# EAGLE board Schematic1_autorouted (EAGLE 9.3.0)
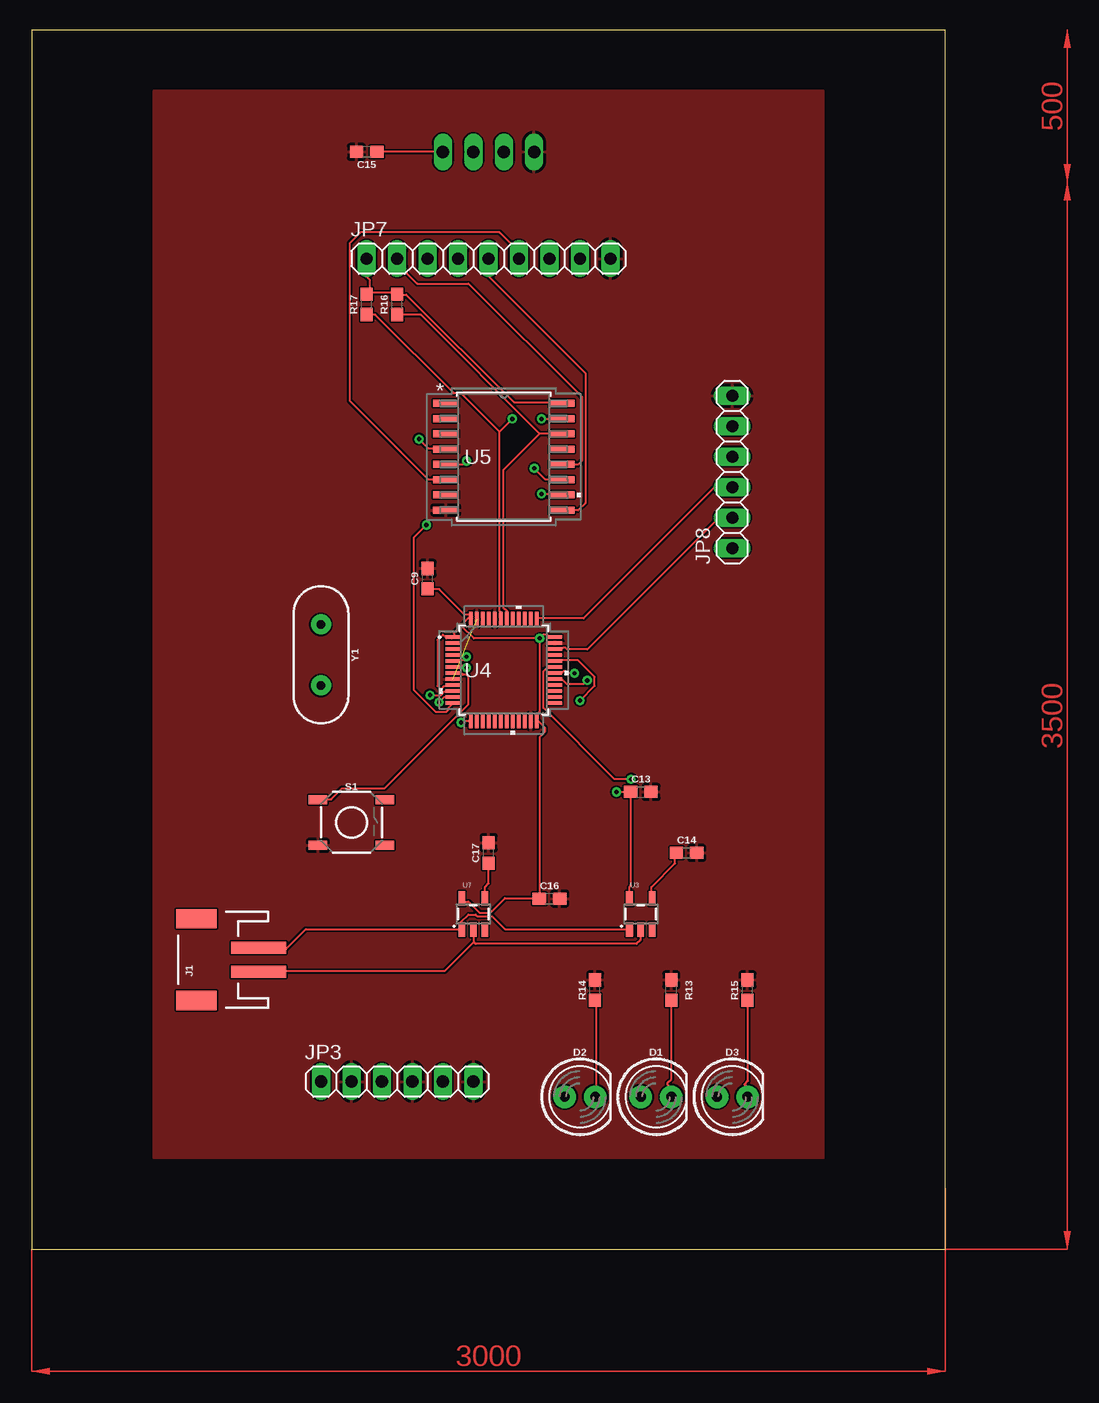
[diagram p0: board, top side]
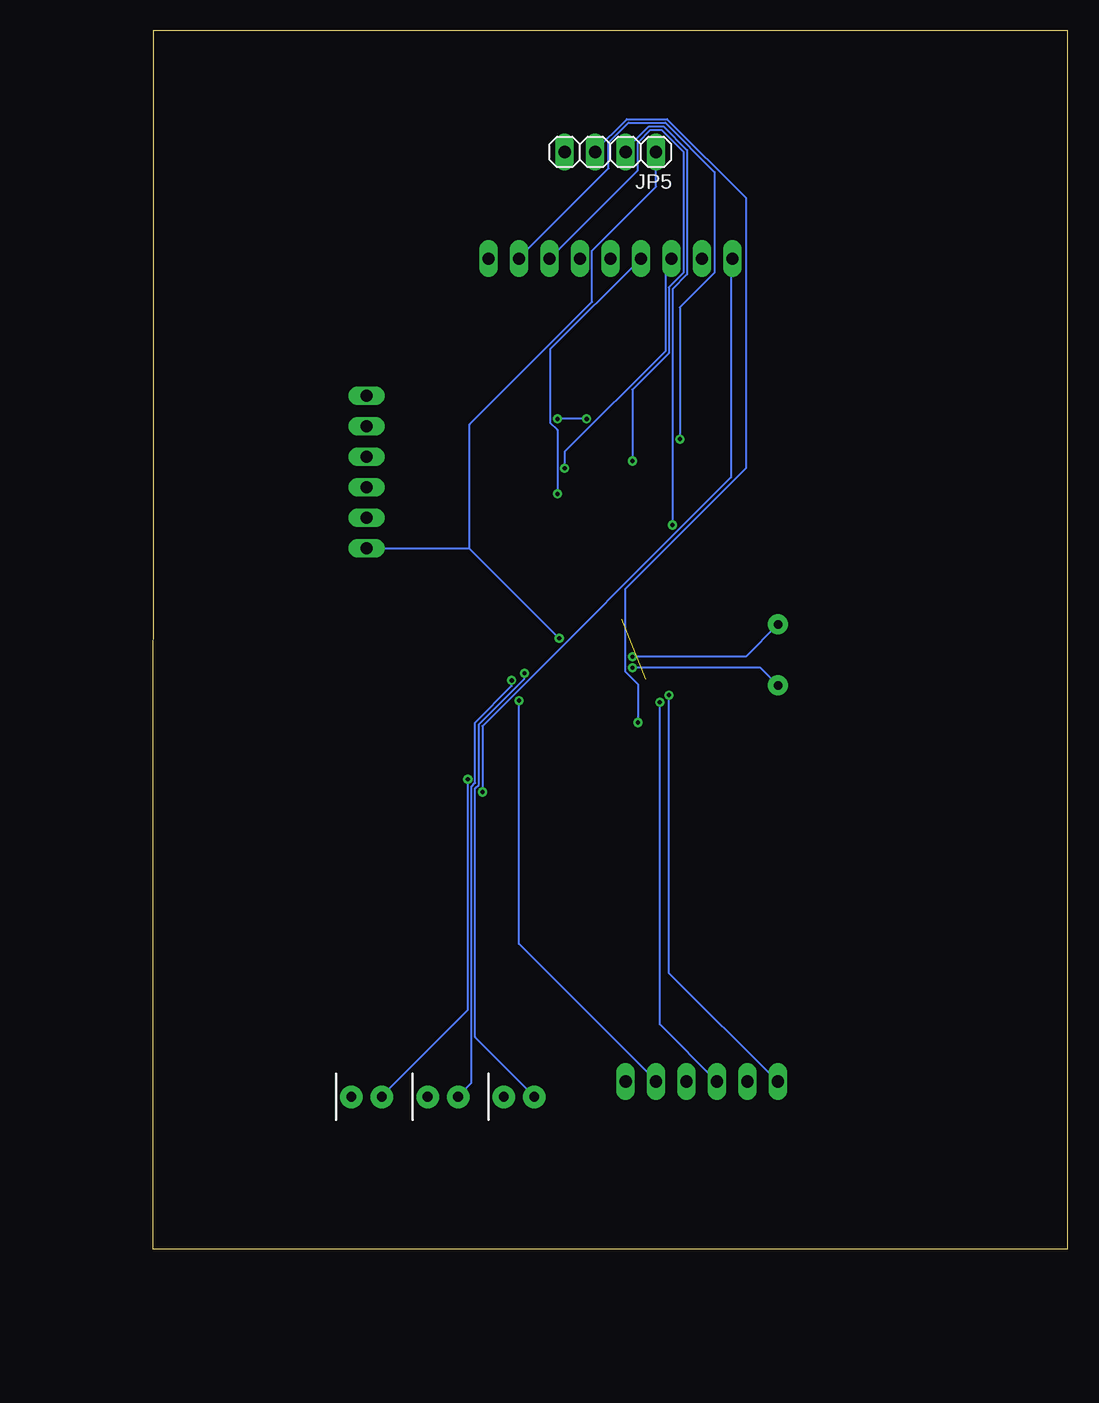
[diagram p1: board, bottom side, seen from below]

Size 76.2 x 101.6 mm. Coordinates in mm from the lower left corner, seen from the top.
Outline: 0,0 76.2,0 76.18,101.6 0,101.6 0,0
Copper layers (1*16): Top 0.035mm / dielectric 1.5mm / Bottom 0.035mm
Design rules "default": minimum track width 6mil, minimum drill 0.35mm, track to track 6mil, track to pad 6mil, pad to pad 6mil, via to via 6mil, smd to smd 6mil, copper to edge 40mil, drill to drill 6mil, minimum pad ring 10mil, minimum via ring 8mil, stop-mask expansion 4mil, vias tented up to drill 0mil, thermal gap 10mil

## Footprints (pad centres in the part's own frame; a part is rotated, then mirrored left to right if it is on the bottom)
0603 = smd 1.1 x 1: 1 -0.85,0; 2 0.85,0
LED_5MM = drill 0.813 pad 1.88: A -1.27,0; K 1.27,0
JST-2-SMD = smd 1 x 4.6: 1 -1,-3.7; 2 1,-3.7 | smd 1.6 x 3.4: NC1 -3.4,1.5; NC2 3.4,1.5
1X06 = drill 1.016 long: 1 -6.35,0; 2 -3.81,0; 3 -1.27,0; 4 1.27,0; 5 3.81,0; 6 6.35,0
1X04 = drill 1.016 long: 1 -3.81,0; 2 -1.27,0; 3 1.27,0; 4 3.81,0
1X09 = drill 1.016 long: 1 -10.16,0; 2 -7.62,0; 3 -5.08,0; 4 -2.54,0; 5 0,0; 6 2.54,0; 7 5.08,0; 8 7.62,0; 9 10.16,0
TACTILE_SWITCH_SMD_5.2MM = smd 1.524 x 0.762: 1 -2.794,1.905; 2 2.794,1.905; 3 -2.794,-1.905; 4 2.794,-1.905
SOT23-5 = smd 0.55 x 1.2: 1 -0.95,-1.3; 2 0,-1.3; 3 0.95,-1.3; 4 0.95,1.3; 5 -0.95,1.3
LQFP48-7X7MM = smd 1.194 x 0.305: 1 -4.25,2.75; 2 -4.25,2.25; 3 -4.25,1.75; 4 -4.25,1.25; 5 -4.25,0.75; 6 -4.25,0.25; 7 -4.25,-0.25; 8 -4.25,-0.75; 9 -4.25,-1.25; 10 -4.25,-1.75; 11 -4.25,-2.25; 12 -4.25,-2.75; 25 4.25,-2.75; 26 4.25,-2.25; 27 4.25,-1.75; 28 4.25,-1.25; 29 4.25,-0.75; 30 4.25,-0.25; 31 4.25,0.25; 32 4.25,0.75; 33 4.25,1.25; 34 4.25,1.75; 35 4.25,2.25; 36 4.25,2.75 | smd 0.305 x 1.194: 13 -2.75,-4.25; 14 -2.25,-4.25; 15 -1.75,-4.25; 16 -1.25,-4.25; 17 -0.75,-4.25; 18 -0.25,-4.25; 19 0.25,-4.25; 20 0.75,-4.25; 21 1.25,-4.25; 22 1.75,-4.25; 23 2.25,-4.25; 24 2.75,-4.25; 37 2.75,4.25; 38 2.25,4.25; 39 1.75,4.25; 40 1.25,4.25; 41 0.75,4.25; 42 0.25,4.25; 43 -0.25,4.25; 44 -0.75,4.25; 45 -1.25,4.25; 46 -1.75,4.25; 47 -2.25,4.25; 48 -2.75,4.25
SOT162-1-M = smd 2.108 x 0.584: 1 -4.826,4.445; 2 -4.826,3.175; 3 -4.826,1.905; 4 -4.826,0.635; 5 -4.826,-0.635; 6 -4.826,-1.905; 7 -4.826,-3.175; 8 -4.826,-4.445; 9 4.826,-4.445; 10 4.826,-3.175; 11 4.826,-1.905; 12 4.826,-0.635; 13 4.826,0.635; 14 4.826,1.905; 15 4.826,3.175; 16 4.826,4.445
HC49US = drill 0.7 pad 1.651: 1 -2.54,0; 2 2.54,0

## Placement (x,y rotation side)
C9  10uF  [0603]  33.02,55.88 90 top
C13  2.2uF  [0603]  50.8,38.1 0 top
C14  470pF  [0603]  54.61,33.02 0 top
C15  2.2uF  [0603]  27.94,91.44 180 top
C16  2.2uF  [0603]  43.18,29.21 0 top
C17  470pF  [0603]  38.1,33.02 90 top
D1  [LED_5MM]  52.07,12.7 0 top
D2  [LED_5MM]  45.72,12.7 0 top
D3  [LED_5MM]  58.42,12.7 0 top
J1  [JST-2-SMD]  15.24,24.13 90 top
JP3  [1X06]  30.48,13.97 0 top
JP5  [1X04]  38.1,91.44 180 bottom
JP7  [1X09]  38.1,82.55 0 top
JP8  [1X06]  58.42,64.77 90 top
R13  [0603]  53.34,21.59 90 top
R14  [0603]  46.99,21.59 90 top
R15  [0603]  59.69,21.59 90 top
R16  [0603]  30.48,78.74 90 top
R17  [0603]  27.94,78.74 90 top
S1  MOMENTARY-SWITCH-SPST-SMD-5.2MM  [TACTILE_SWITCH_SMD_5.2MM]  26.67,35.56 0 top
U3  5V  [SOT23-5]  50.8,27.94 0 top
U4  STM32F0XXC1T  [LQFP48-7X7MM]  39.37,48.26 0 top
U5  PCF8574T/3,512SOT162-1-M  [SOT162-1-M]  39.37,66.04 0 top
U7  3.3V/150mA  [SOT23-5]  36.83,27.94 0 top
Y1  [HC49US]  24.13,49.53 270 top

## Library data of the parts
C9 = SparkFun-Capacitors; PROD_ID: CAP-11015
C13 C15 C16 = SparkFun-Capacitors; PROD_ID: CAP-07888
C14 C17 = SparkFun-Capacitors; PROD_ID: CAP-07884
D1-D3 = SparkFun-LED
J1 = SparkFun-Connectors; PROD_ID: CONN-11443; SF_ID: PRT-08612
JP3 JP5 JP7 JP8 = pinhead
R13-R17 = SparkFun-Resistors
S1 = SparkFun-Switches; PROD_ID: SWCH-08247; SF_SKU: COM-08720
U3 = SparkFun-IC-Power; PROD_ID: VREG-00823
U4 = ECE477_Resources; MANUFACTURER_PART_NUMBER: stm32f0xxc1t; VENDOR: STMicroelectronics
U5 = ECE477_Resources; MANUFACTURER_PART_NUMBER: PCF8574T3512; VENDOR: NXP
U7 = SparkFun-IC-Power; PROD_ID: VREG-00822
Y1 = SparkFun-Clocks

## Nets
A0: JP3.1 U4.10
A1: JP3.3 U4.11
A2: JP5.2 U4.12
A3: JP5.3 U4.13
A4: U4.14
A5: U4.15
A6: U4.16
A7: U4.17
A8: D1.A U4.29
A9: D2.A U4.30
A10: D3.A U4.31
A11: JP3.5 U4.32
A13: JP8.2 U4.34
A14: JP8.3 U4.37
B6: R16.1 U4.42 U5.14
B7: R17.1 U4.43 U5.15
D0: JP7.8 U5.4
D1: JP7.7 U5.5
D2: JP7.6 U5.6
D4: JP7.5 U5.9
D5: JP7.4 U5.10
D6: JP7.3 U5.11
D7: JP7.2 U5.12
GND: C9.2 C13.2 C14.2 C15.2 C16.2 C17.2 JP3.2 JP3.4 JP3.6 JP5.4 JP7.9 JP8.6 R13.2 R14.2 R15.2 S1.3 U4.8 U4.23 U4.35 U4.44 U4.47 U5.8
N$10: S1.1 U4.7
N$21: U4.5 Y1.1
N$22: U4.6 Y1.2
N$32: J1.1 U3.2 U7.2
N$34: C17.1 U7.4
N$37: C14.1 U3.4
N$38: J1.2 U3.1 U7.1
N$39: D1.K R13.1
N$41: D2.K R14.1
N$42: D3.K R15.1
P3.3V: C9.1 C15.1 C16.1 JP5.1 JP8.1 U4.1 U4.9 U4.24 U4.36 U4.48 U7.5
P5V: C13.1 JP7.1 R16.2 R17.2 U3.5 U5.16

## Tracks (layer width: path | path; a pad name or v marks a point on that pad's centre or on a via)
A0  (via drill 0.35)
  Top 0.152: v33.22,46.18 34.14,46.18 34.44,46.48 35.05,46.48 U4.10
  Bottom 0.152: v33.22,46.18 33.22,23.01 24.23,14.02 JP3.1
A1  (via drill 0.35)
  Top 0.152: v33.98,45.57 34.44,46.02 35.05,46.02 U4.11
  Bottom 0.152: v33.98,45.57 33.98,18.75 JP3.3
A2  (via drill 0.35)
  Top 0.152: v32.92,60.35 31.85,59.28 31.85,46.63 33.68,44.81 34.59,44.81 34.75,44.96 34.75,45.11 35.05,45.41 U4.12
  Bottom 0.152: v32.92,60.35 32.92,80.01 31.7,81.23 31.7,91.59 33.68,93.57 34.9,93.57 36.73,91.75 36.73,91.44 JP5.2
A3  (via drill 0.35)
  Top 0.152: v35.81,43.89 35.97,44.04 36.58,44.04 U4.13
  Bottom 0.152: v35.81,43.89 35.81,47.09 36.88,48.16 36.88,55.02 26.82,65.08 26.82,87.63 33.38,94.18 36.73,94.18 39.47,91.44 JP5.3
A8  (via drill 0.35)
  Top 0.152: v46.33,47.4 46.02,47.09 44.65,47.09 44.2,47.55 43.74,47.55 U4.29
  Bottom 0.152: v46.33,47.4 46.33,46.94 49.38,43.89 49.38,38.86 49.68,38.56 49.68,13.87 50.75,12.8 D1.A
A9  (via drill 0.35)
  Top 0.152: v45.26,48.01 44.65,48.01 44.5,48.16 44.35,48.16 44.2,48.01 43.74,48.01 U4.30
  Bottom 0.152: v45.26,48.01 45.26,47.55 49.07,43.74 49.07,38.71 49.38,38.41 49.38,17.68 44.5,12.8 D2.A
A10  (via drill 0.35)
  Top 0.152: v49.99,39.17 48.62,39.17 42.67,45.11 42.67,48.16 42.98,48.46 43.59,48.46 U4.31
  Bottom 0.152: v49.99,39.17 49.99,19.96 57.15,12.8 D3.A
A11  (via drill 0.35)
  Top 0.152: v45.72,45.72 46.94,46.94 46.94,47.7 45.57,49.07 43.74,49.07 U4.32
  Bottom 0.152: v45.72,45.72 45.72,25.45 34.29,14.02 JP3.5
A13
  Top 0.152: JP8.2 57.3,60.96 46.33,49.99 44.65,49.99 44.5,50.14 44.35,50.14 44.2,49.99 43.74,49.99 U4.34
A14
  Top 0.152: U4.37 42.22,52.58 46.02,52.58 56.84,63.4 58.37,63.4 JP8.3
B6
  Top 0.152: 42.37,67.97 32.46,77.88 30.48,77.88 R16.1 | 42.37,67.97 44.2,67.97 U5.14 | 42.37,67.97 39.32,64.92 39.32,53.49 39.62,53.19 39.62,52.58 U4.42
B7  (via drill 0.35)
  Top 0.152: 39.01,68.12 35.81,71.32 35.2,71.32 28.65,77.88 28.04,77.88 R17.1 | 39.01,68.12 39.01,53.19 39.17,53.03 39.17,52.58 U4.43 | v42.52,69.19 44.2,69.19 U5.15 | 39.01,68.12 v40.08,69.19
  Bottom 0.152: v40.08,69.19 v42.52,69.19
D0  (via drill 0.35)
  Top 0.152: v32.31,67.51 33.07,66.75 34.44,66.75 U5.4
  Bottom 0.152: v32.31,67.51 32.31,78.49 29.41,81.38 29.41,89.76 33.53,93.88 36.58,93.88 38.25,92.2 38.25,90.07 45.72,82.6 JP7.8
D1  (via drill 0.35)
  Top 0.152: v36.27,65.68 35.97,65.38 34.59,65.38 U5.5
  Bottom 0.152: v36.27,65.68 36.27,71.63 33.22,74.68 33.22,80.16 32,81.38 32,91.44 33.83,93.27 34.75,93.27 35.81,92.2 35.81,89.92 JP7.7
D2
  Top 0.152: U5.6 34.44,64.16 33.07,64.16 26.52,70.71 26.52,83.82 27.43,84.73 39.01,84.73 40.54,83.21 40.54,82.6 JP7.6
D4
  Top 0.152: JP7.5 38.1,81.08 46.18,73 46.18,62.18 45.57,61.57 44.2,61.57 U5.9
D5  (via drill 0.35)
  Top 0.152: v42.52,62.94 44.2,62.94 U5.10
  Bottom 0.152: v42.52,62.94 42.52,68.28 43.13,68.89 43.13,74.98 JP7.4
D6  (via drill 0.35)
  Top 0.152: v41.91,65.08 42.82,64.16 44.2,64.16 U5.11
  Bottom 0.152: v41.91,65.08 41.91,66.45 33.53,74.83 33.53,81.99 33.07,82.45 JP7.3
D7
  Top 0.152: JP7.2 30.48,82.14 32.16,80.47 36.42,80.47 45.87,71.02 45.87,65.68 45.57,65.38 44.2,65.38 U5.12
GND  (1 unrouted)
  pour Top: 10.16,7.62 66.04,7.62 66.04,96.52 10.16,96.52
N$10
  Top 0.152: U4.7 35.2,48.01 35.81,48.01 35.97,47.85 36.27,47.85 36.42,47.7 36.42,45.41 29.41,38.41 25.91,38.41 24.99,37.49 23.93,37.49 S1.1
N$21  (via drill 0.35)
  Top 0.152: v36.27,49.38 36.27,49.23 36.12,49.07 35.2,49.07 U4.5
  Bottom 0.152: v36.27,49.38 26.82,49.38 Y1.1
N$22  (via drill 0.35)
  Top 0.152: v36.27,48.46 36.12,48.62 35.81,48.62 35.66,48.46 35.2,48.46 U4.6
  Bottom 0.152: v36.27,48.46 25.6,48.46 Y1.2
N$32
  Top 0.152: 36.88,25.6 36.88,26.52 U7.2 | 36.88,25.6 37.03,25.45 50.44,25.45 50.75,25.76 50.75,26.52 U3.2 | 36.88,25.6 34.44,23.16 19.05,23.16 J1.1
N$34
  Top 0.152: C17.1 38.1,30.48 37.8,30.18 37.8,29.26 U7.4
N$37
  Top 0.152: C14.1 53.65,32.92 53.65,32.16 51.66,30.18 51.66,29.26 U3.4
N$38
  Top 0.152: 35.81,26.67 22.86,26.67 21.18,24.99 19.05,24.99 J1.2 | 35.81,26.67 35.81,27.28 36.42,27.89 37.03,27.89 37.19,27.74 38.41,27.74 39.47,26.67 49.84,26.67 U3.1 | 35.81,26.67 U7.1
N$39
  Top 0.152: R13.1 53.34,14.17 53.03,13.87 53.03,13.72 53.34,13.41 D1.K
N$41
  Top 0.152: R14.1 47.09,20.73 47.09,12.8 D2.K
N$42
  Top 0.152: R15.1 59.74,20.73 59.74,14.02 59.44,13.72 59.59,13.56 59.59,12.8 D3.K
P3.3V  (via drill 0.35)
  Top 0.152: U4.9 35.05,46.94 34.44,46.94 34.14,46.63 33.83,46.94 33.83,50.75 34.29,51.21 34.59,50.9 35.05,50.9 U4.1 35.2,51.05 35.2,51.36 35.81,51.97 | 36.58,52.88 36.12,52.88 33.98,55.02 33.07,55.02 C9.1 | 36.58,52.88 36.73,52.73 36.73,52.58 U4.48 36.58,52.88 | 35.81,51.97 36.58,52.73 36.58,52.88 | JP5.1 C15.1 | U7.5 35.81,29.11 35.97,28.96 36.42,28.96 37.34,28.04 38.25,28.04 39.47,29.26 42.22,29.26 C16.1 42.37,29.26 42.37,42.67 42.82,43.13 42.82,43.43 42.22,44.04 U4.24 42.06,44.04 42.06,44.5 42.37,44.81 v42.37,50.9 | v42.37,50.9 42.67,51.21 42.98,51.21 43.13,51.05 43.59,51.05 U4.36 | 35.81,51.97 36.88,50.9 v42.37,50.9
  Bottom 0.152: 49.84,58.37 58.37,58.37 JP8.1 | v42.37,50.9 49.84,58.37 | JP5.1 34.29,88.54 39.62,83.21 39.62,78.94 49.84,68.73 49.84,58.37
P5V  (via drill 0.35)
  Top 0.152: U3.5 49.84,29.26 49.84,30.18 49.99,30.33 49.99,38.1 C13.1 v48.77,38.1 | 28.19,79.7 30.48,79.7 R16.2 30.48,79.55 31.24,79.55 40.23,70.56 44.2,70.56 U5.16 | 28.19,79.7 28.04,79.7 R17.2 28.19,79.7 | 28.19,79.7 28.19,80.77 27.89,81.08 27.89,82.45 JP7.1
  Bottom 0.152: v48.77,38.1 48.77,43.59 28.04,64.31 28.04,82.45 JP7.1
(copper drawn outside any net)
  shapes: Top area x3